# Altium PCB PCB_ESP32.PcbDoc
Units mm, origin at the board's own origin, x right, y up, seen from the top; angles counter-clockwise.
Board outline 57.76 x 27.88 mm, 2 copper layers (Top Layer, Bottom Layer); 40 components, 42 nets, 209 pads, 82 vias.
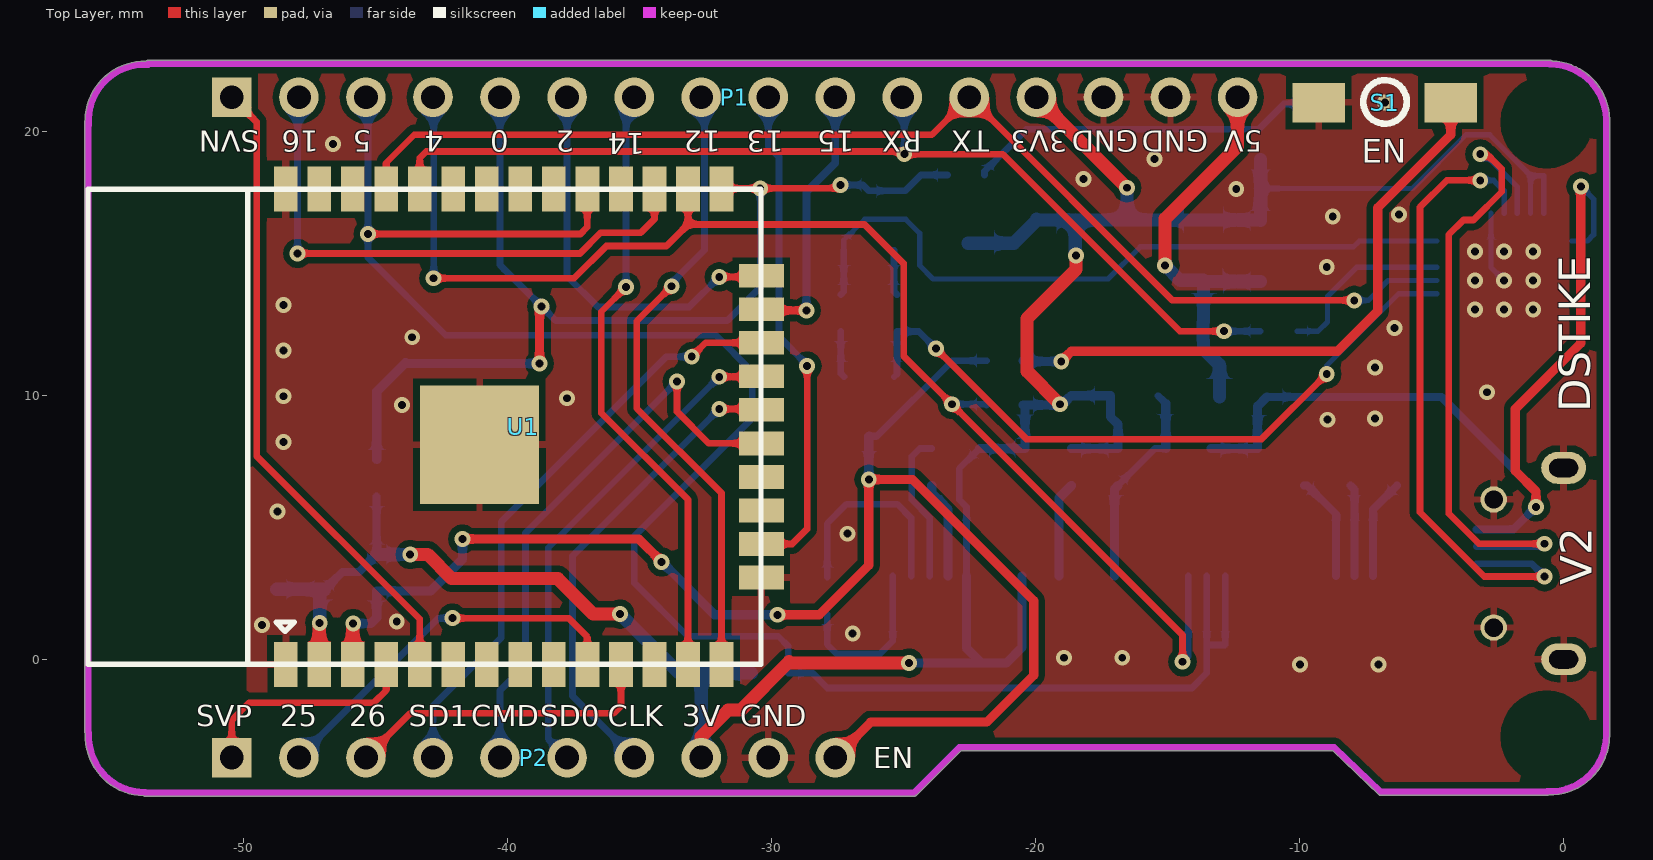
[diagram p0: Top Layer view]
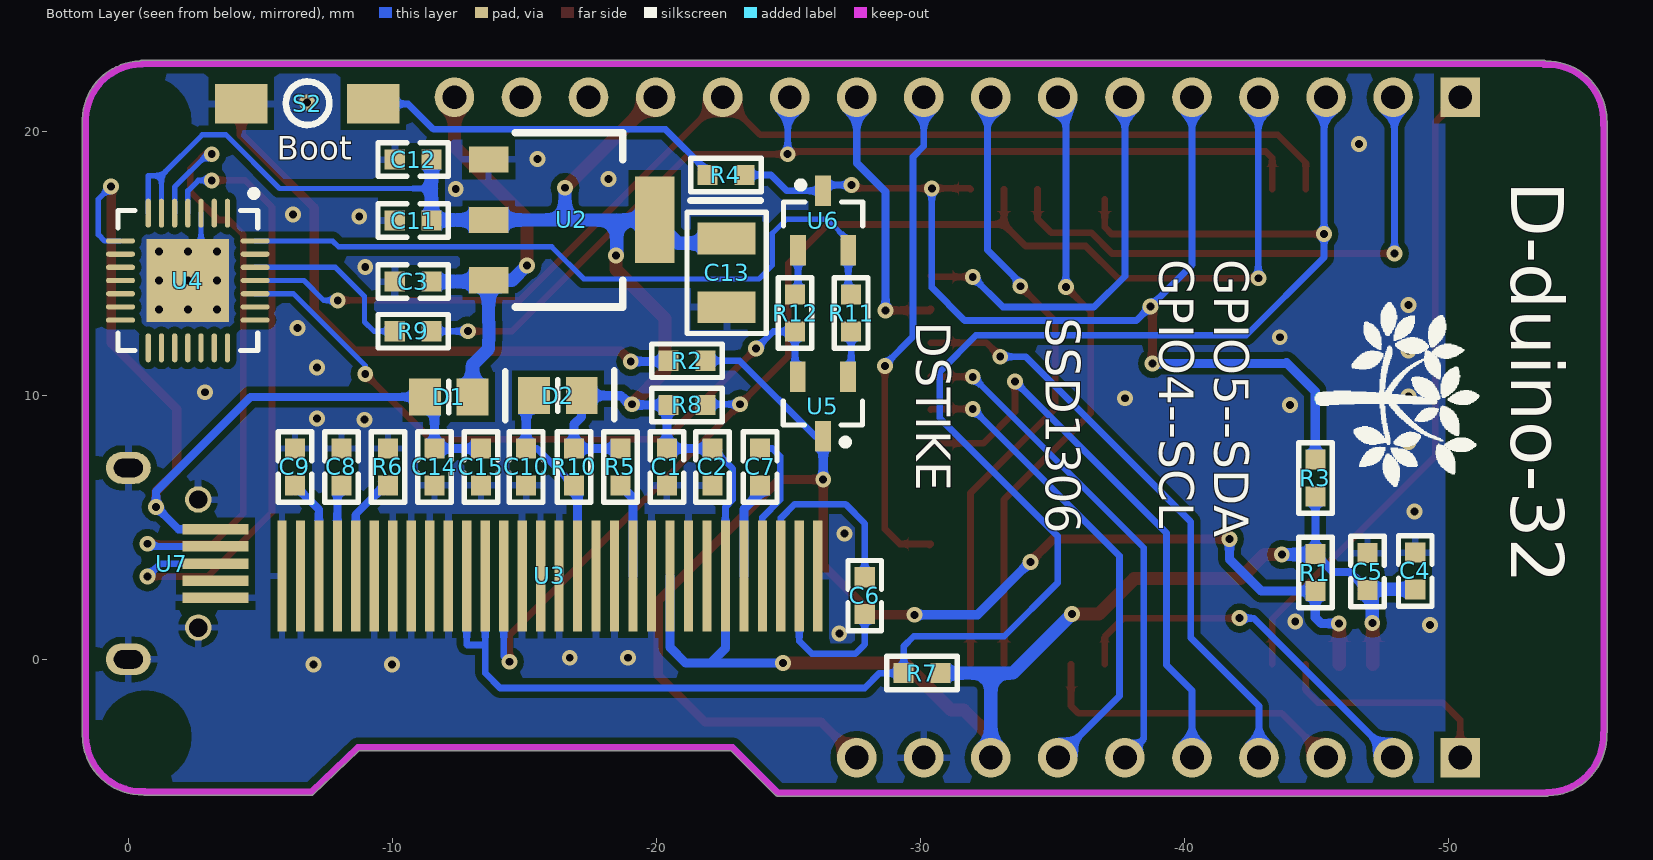
[diagram p1: Bottom Layer view, seen from below]

## Layer stack, top to bottom
Top Solder: solder mask 0.0102, Solder Resist, Dk 3.5
Top Layer: signal copper 0.0356
Dielectric 1: dielectric 0.32, FR-4, Dk 4.8
Bottom Layer: signal copper 0.0356
Bottom Solder: solder mask 0.0102, Solder Resist, Dk 3.5

## Board outline
-53.729,-5.184 -24.607,-5.184 ccw(c-24.607,-5.057) -24.517,-5.146 -24.517,-5.147 -22.841,-3.471 -8.742,-3.471 -7.014,-5.114 ccw(c-6.927,-5.022) -6.927,-5.149 -0.619,-5.149 ccw(c-0.619,-5.022) -0.563,-5.136 ccw(c-0.516,-2.882) 1.737,-2.95 ccw(c1.617,-2.907) 1.745,-2.907 1.745,20.41 ccw(c1.617,20.41) 1.742,20.435 ccw(c1.617,20.461) 1.745,20.461 ccw(c1.617,20.461) 1.745,20.464 ccw(c-0.509,20.412) -0.441,22.666 ccw(c-0.519,22.565) -0.519,22.692 -53.625,22.692 ccw(c-53.625,22.565) -53.71,22.66 ccw(c-53.755,20.406) -56.009,20.447 ccw(c-55.888,20.406) -56.016,20.406 -56.016,-2.784 ccw(c-55.888,-2.784) -56.002,-2.843 ccw(c-53.748,-2.912) -53.794,-5.166 ccw(c-53.729,-5.057)

## Design rules (kind name [scope] priority, off if disabled: settings)
Clearance [All] p1: gap=0.254
PolygonConnect PolygonConnect_cp2102 [HasFootprint('cp2102') And OnLayer('Bottom Layer')] p1: connectstyle=Direct reliefconductorwidth=0.254 reliefentries=4 polygonreliefangle="90 Angle" airgapwidth=0.254
PolygonConnect PolygonConnect_GND [IsVia] p2: connectstyle=Direct reliefconductorwidth=0.254 reliefentries=4 polygonreliefangle="90 Angle" airgapwidth=0.254
PolygonConnect [All] p3: connectstyle=Relief reliefconductorwidth=0.254 reliefentries=4 polygonreliefangle="90 Angle" airgapwidth=0.254
RoutingVias [All] p1: holewidth=0.711 width=1.27 viastyle="Through Hole" minholewidth=0.711 minwidth=1.27 maxholewidth=0.711 maxwidth=1.27
SolderMaskExpansion [All] p1: expansion=0.102
Width [All] p1: maxlimit=1 minlimit=0.2 preferedwidth=0.254
30 further rules are at their usual default settings.

## Components (designator, comment, footprint, x,y, rotation, side; value= is the part's Value field where it differs from the comment)
C1 "1uF" C0603 -20.224,8.011 r270 bottom
C2 "1uF" C0603 -21.954,8.011 r270 bottom
C3 "10uF" C0603 -11.515,14.488 r0 bottom
C4 "10uF" C0603 -48.929,2.626 r90 bottom
C5 "22uF" C0603 -47.125,2.6 r90 bottom
C6 "1uF" C0603 -28.075,1.686 r90 bottom
C7 "1uF" C0603 -24.113,6.563 r90 bottom
C8 "4.7uF" C0603 -8.247,6.563 r90 bottom
C9 "2.2uF" C0603 -6.485,6.563 r90 bottom
C10 "4.7uF" C0603 -14.893,8.011 r270 bottom
C11 "10uF" C0603 -11.515,16.799 r0 bottom
C12 "100nF" C0603 -11.515,19.11 r0 bottom
C13 "100uF" C3528 -22.665,14.64 r270 bottom
C14 "10uF" C0603 -11.415,8.011 r270 bottom
C15 "100nF" C0603 -13.177,8.011 r270 bottom
D1 "1N5819" 1N4148 -11.321,9.919 r180 bottom
D2 "1N4148" 1N4148 -15.452,9.966 r180 bottom
P1 "Header 16" HDR1X16 -50.453,21.295 r0 top
P2 "Header 10" HDR1X10 -50.453,-3.724 r0 top
R1 "12K" R0603 -44.966,3.286 r90 bottom
R2 "470" R0603 -21.167,11.313 r180 bottom
R3 "12K" R0603 -44.966,6.868 r270 bottom
R4 "470" R0603 -22.64,18.348 r180 bottom
R5 "4.7K" R0603 -18.64,7.287 r270 bottom
R6 "910K" R0603 -9.831,7.287 r270 bottom
R7 "4.7K" R0603 -30.069,-0.524 r0 bottom
R8 "4.7K" R0603 -21.167,9.636 r180 bottom
R9 "470" R0603 -10.791,12.43 r180 bottom
R10 "4.7K" R0603 -16.879,7.287 r270 bottom
R11 "12K" R0603 -27.383,13.116 r90 bottom
R12 "12K" R0603 -25.256,13.116 r270 bottom
S1 "贴片按钮" SWITCH -6.714,21.142 r270 top
S2 "贴片按钮" SWITCH -6.841,21.092 r270 bottom
U1 "ESP32s" ESP32S -41.131,8.252 r90 top
U2 "AMS1117" AMS1117 -17.23,16.672 r270 bottom
U3 "SSD1306" SSD1306 -26.296,2.651 r0 bottom
U4 "CP2102" CP2102 -2.228,14.351 r270 bottom
U5 "S8050" S8050 -26.385,9.654 r270 bottom
U6 "S8050" S8050 -26.243,16.545 r90 bottom
U7 "MicroUSB-5P" MICROUSB_5S -2.65,1.205 r90 bottom

## Footprints (in the part's own frame and the unit in brackets; to place one, negate y for a bottom-side part, rotate by r counter-clockwise, add the part's x,y. Pads: shape width x height; smd on the part's side, far side on the other; paste and mask are expansions set on the pad)
1N4148 [mm]
  rect 1.2x1.4 smd: 1(-0.082,0.022) 2(1.718,0.022)
  silkscreen extent 0.82,-0.87 2.96,0.98, body extent -0.26,-0.68 1.89,0.72, height 0.7
AMS1117 [mil]
  rect 39x59 smd: 1(-89,-141) 3(91,-141)
  rect 38.98x59.06 smd: 2(1,-141)
  rect 129.13x59 smd: 2(1,107.03)
  silkscreen extent -129,-101 131,59
C0603 [mil]
  rect 30x30 smd: 1(1,7) 2(56,7)
  silkscreen extent -24,-18 81,32
C3528 [mm]
  rect 1.2x2.2 smd: 1(-1.3,0) 2(1.3,0)
  silkscreen extent -2.74,-1.5 2.3,1.5
CP2102 [mm]
  oval 1.1x0.2 smd: 1(-2.55,1.525) 2(-2.55,1.025) 3(-2.55,0.525) 4(-2.55,0.025) 5(-2.55,-0.475) 6(-2.55,-0.975) 7(-2.55,-1.475) 15(2.55,-1.475) 16(2.55,-0.975) 17(2.55,-0.475) 18(2.55,0.025) 19(2.55,0.525) 20(2.55,1.025) 21(2.55,1.525)
  oval 0.2x1.1 smd: 8(-1.5,-2.525) 9(-1,-2.525) 10(-0.5,-2.525) 11(0,-2.525) 12(0.5,-2.525) 13(1,-2.525) 14(1.5,-2.525) 22(1.5,2.575) 23(1,2.575) 24(0.5,2.575) 25(0,2.575) 26(-0.5,2.575) 27(-1,2.575) 28(-1.5,2.575)
  rect 3.13x3.13 smd: 29(0,0.025)
  silkscreen extent -3.42,-2.62 2.65,2.68, body extent -2.5,-2.47 2.5,2.53, height 1
ESP32S [mm]
  rect 1.7x0.9 smd: 1(-8.441,7.283) 2(-8.441,6.013) 3(-8.441,4.743) 4(-8.441,3.473) 5(-8.441,2.203) 6(-8.441,0.933) 7(-8.441,-0.337) 8(-8.441,-1.607) 9(-8.441,-2.877) 10(-8.441,-4.147) 11(-8.441,-5.417) 12(-8.441,-6.687) 13(-8.441,-7.957) 14(-8.441,-9.227) 25(9.559,-9.227) 26(9.559,-7.957) 27(9.559,-6.687) 28(9.559,-5.417) 29(9.559,-4.147) 30(9.559,-2.877) 31(9.559,-1.607) 32(9.559,-0.337) 33(9.559,0.933) 34(9.559,2.203) 35(9.559,3.473) 36(9.559,4.743) 37(9.559,6.013) 38(9.559,7.283)
  rect 0.9x1.7 smd: 15(-5.151,-10.737) 16(-3.881,-10.737) 17(-2.611,-10.737) 18(-1.341,-10.737) 19(-0.071,-10.737) 20(1.199,-10.737) 21(2.469,-10.737) 22(3.739,-10.737) 23(5.009,-10.737) 24(6.279,-10.737)
  rect 4.5x4.5 smd: 39(-0.121,-0.057)
  silkscreen extent -8.44,-10.73 9.56,14.77
HDR1X10 [mm] "Connector; Header; 10 Position"
  rect 1.5x1.5 hole 0.9: 1(0,0)
  round 1.5 hole 0.9: 2(2.54,0) 3(5.08,0) 4(7.62,0) 5(10.16,0) 6(12.7,0) 7(15.24,0) 8(17.78,0) 9(20.32,0) 10(22.86,0)
HDR1X16 [mm] "Connector; Header; 16 Position"
  rect 1.5x1.5 hole 0.9: 1(0,0)
  round 1.5 hole 0.9: 2(2.54,0) 3(5.08,0) 4(7.62,0) 5(10.16,0) 6(12.7,0) 7(15.24,0) 8(17.78,0) 9(20.32,0) 10(22.86,0) 11(25.4,0) 12(27.94,0) 13(30.48,0) 14(33.02,0) 15(35.56,0) 16(38.1,0)
MICROUSB_5S [mm]
  rect 0.4x2.5 smd: 1(3.721,-0.65) 2(3.071,-0.65) 3(2.421,-0.65) 4(1.771,-0.65) 5(1.121,-0.65)
  round 1 hole 0.7 unplated: 6(0,0) 7(4.85,0)
  oval 1.2x1.7 hole 0.7 slot 1.1 at 90 deg unplated: 8(-1.205,2.65) 9(6.045,2.65)
R0603 [mil]
  rect 30x30 smd: 1(-27.5,0) 2(27.5,0)
  silkscreen extent -52,-25 52,25
S8050 [mm]
  rect 1.15x0.6 smd: 1(-1.049,0.874) 2(-1.049,-1.026) 3(1.201,-0.076)
  silkscreen extent -0.12,-1.58 1.55,1.42, body extent -0.62,-1.58 0.78,1.42, height 1.1
SSD1306 [mm]
  rect 0.35x4.2 smd: 1(0.178,-0.508) 2(0.878,-0.508) 3(1.578,-0.508) 4(2.278,-0.508) 5(2.978,-0.508) 6(3.678,-0.508) 7(4.378,-0.508) 8(5.078,-0.508) 9(5.778,-0.508) 10(6.478,-0.508) 11(7.178,-0.508) 12(7.878,-0.508) 13(8.578,-0.508) 14(9.278,-0.508) 15(9.978,-0.508) 16(10.678,-0.508) 17(11.378,-0.508) 18(12.078,-0.508) 19(12.778,-0.508) 20(13.478,-0.508) 21(14.178,-0.508) 22(14.878,-0.508) 23(15.578,-0.508) 24(16.278,-0.508) 25(16.978,-0.508) 26(17.678,-0.508) 27(18.378,-0.508) 28(19.078,-0.508) 29(19.778,-0.508) 30(20.478,-0.508)
SWITCH [mm]
  rect 1.5x2 smd: 1(0.051,2.438) 2(0.051,-2.562)
  silkscreen extent -0.8,-0.87 0.85,0.77

## Part data
C1 C2 C3 C4 C5 C6 C7 C8 C9 C10 C11 C12 C14 C15: library part C0603, "贴片电容"
C13: library part "Cap Semi", "Capacitor 3.5x2.8mm"
D1: library part 1N4148, "二极管"
D2: "二极管"
P1: "Header, 16-Pin"
P2: "Header, 10-Pin"
R1 R2 R3 R4 R5 R6 R7 R8 R9 R10 R11 R12: library part R0603, "贴片电阻"
S1 S2: library part Switch, "3*4*2mm开关"
U1: library part ESP32, "WIFI&Bluetooth"
U2: "3.3V稳压芯片"
U3: "0.96寸OLED"
U4: "USB转串口芯片"
U5 U6: "三极管"
U7: library part MicroUSB_5S, "Micro USB插脚"

## Free pads (board coordinates)
  round 3 on Keep-Out: ""(-53.755,-2.911) ""(-53.755,20.38) ""(-0.646,-2.937) ""(-0.646,20.355)

## Via types
v1: diameter 0.6, hole 0.3, Top Layer to Bottom Layer, tented both sides, 82 vias

## Nets (pads, with @x,y where several pads share a name; then routed paths per layer and width w, separated by ;. In a path a pad name is that pad's centre, name@x,y a point inside that pad or via, vN(x,y) a via of type N, cw(c..) or ccw(c..) an arc to the next point about the centre after c; other vN are vias at no path point)
#EN: P2.10 R1.1 R2.2 U1.3 U5.3 | length 55.7
  Top Layer w0.35: v1(-41.715,4.556) -35.035,4.556 v1(-34.171,3.693) ; v1(-29.777,1.686) -28.202,1.686 -26.323,3.566 v1(-26.323,6.817) -24.672,6.817 -20.074,2.219 -20.074,-0.6 -21.852,-2.378 -26.247,-2.378 P2.10
  Top Layer w0.5: U1.3 -45.874,1.337 v1(-45.855,1.356)
  Bottom Layer w0.254: U5.3 -26.007,8.453 -23.148,11.313 R2.2
  Bottom Layer w0.35: v1(-45.855,1.356) -45.195,1.356 -44.966,1.584 R1.1 -42.922,2.588 -41.715,3.794 v1(-41.715,4.556) ; v1(-34.171,3.693) -32.165,1.686 v1(-29.777,1.686) ; v1(-26.323,6.817) -26.323,8.439 U5.3
CLK: P2.7 U1.20 | length 18.1
  Top Layer w0.254: v1(-31.987,9.484) -30.427,9.484 U1.20
  Bottom Layer w0.254: P2.7 -37.55,-1.387 -37.55,3.921 v1(-31.987,9.484)
CMD: P2.5 U1.19 | length 21.9
  Top Layer w0.254: v1(-33.587,10.525) -33.587,9.382 -32.386,8.181 U1.19
  Bottom Layer w0.254: P2.5 -40.293,-1.184 -39.328,-0.219 -39.328,4.785 v1(-33.587,10.525)
D_N: U4.5 U7.2 | length 24.8
  Top Layer w0.254: v1(-3.158,19.136) -2.904,19.136 -2.345,18.577 -2.345,17.713 -3.412,16.647 -3.793,16.647 -4.352,16.088 -4.352,5.521 -3.209,4.378 v1(-0.72,4.378)
  Bottom Layer w0.2: v1(-3.158,19.136) -2.999,19.136 -1.753,17.89 U4.5
  Bottom Layer w0.254: U7.2 -0.822,4.276 v1(-0.72,4.378)
D_P: U4.4 U7.3 | length 24.7
  Top Layer w0.254: v1(-3.158,18.145) -4.428,18.145 -5.444,17.129 -5.444,5.572 -3.006,3.134 v1(-0.72,3.134)
  Bottom Layer w0.2: v1(-3.158,18.145) -2.65,18.145 -2.253,17.748 U4.4
  Bottom Layer w0.254: U7.3 -1.211,3.626 v1(-0.72,3.134)
DTR: R11.2 U4.28 U6.2 | length 27.2
  Bottom Layer w0.2: U6.2 -27.269,15.878 -26.475,16.672 -24.926,16.672 -24.392,16.139 -24.392,14.919 -23.884,14.411 -17.255,14.411 -16.036,15.631 -7.959,15.631 -7.739,15.851 U4.28
  Bottom Layer w0.254: R11.2 -27.269,13.928 U6.2
GND: C1.2 C2.2 C3.2 C4.2 C5.2 C8.2 C9.2 C10.2 C11.2 C12.2 C13.2 C14.2 C15.2 P1.14 P1.15 P2.9 R6.1 S1.2 S2.2 U1.1 U1.15 U1.38 U1.39 U2.1 U3.1 U3.8 U3.10 U3.12 U3.13 U3.15 U3.16 U3.17 U3.21 U3.22 U3.23 U3.24 U3.25 U3.29 U3.30 U4.3 U4.29 U7.5 U7.6 U7.7 U7.8 U7.9 | length 2.8
  Bottom Layer w0.2: U4.3 -2.753,14.851 v1(-2.253,14.351)
  other v1: -9.991,-0.194 -7.019,-0.194 -18.931,0.06 -16.722,0.06 -26.932,0.975 -49.31,1.305 -44.204,1.432 -27.136,4.759 -48.726,5.598 -48.497,8.239 -8.949,9.077 -7.146,9.128 -44.001,9.636 -37.753,9.89 -48.497,9.966 -2.904,10.119 -7.146,11.059 -48.497,11.694 -43.62,12.202 -6.409,12.557 -3.353,13.251 -2.253,13.251 -1.153,13.251 -48.497,13.421 -3.353,14.351 -1.153,14.351 -8.975,14.869 -3.353,15.451 -2.253,15.451 -1.153,15.451 -8.746,16.774 -6.231,16.85 -12.404,17.815 -18.195,18.196 -15.502,18.958 -46.617,19.517 -6.765,21.092
GPIO0: P1.5 R3.1 R4.2 U1.25 U6.3 | length 41.8
  Top Layer w0.254: U1.25 -31.874,17.84 v1(-30.438,17.84) -27.517,17.84 v1(-27.39,17.967)
  Top Layer w0.35: v1(-38.794,11.211) -38.794,13.294 v1(-38.718,13.37)
  Bottom Layer w0.254: P1.5 -40.293,14.945 -40.14,14.792 ; -40.14,14.767 -40.14,14.792 ; v1(-30.438,17.84) -30.438,14.081 -31.682,12.837 -38.185,12.837 v1(-38.718,13.37) -40.14,14.792 ; v1(-27.39,17.967) -26.541,17.967 U6.3 -24.944,17.746 -24.342,18.348 R4.2
  Bottom Layer w0.35: R3.1 -44.966,10.144 -43.874,11.236 -43.849,11.211 v1(-38.794,11.211)
GPIO2: P1.6 U1.24 | length 15.1
  Top Layer w0.254: v1(-31.987,14.488) -30.437,14.488 U1.24
  Bottom Layer w0.254: P1.6 -37.753,14.513 -36.584,13.345 -33.13,13.345 v1(-31.987,14.488)
GPIO4: P1.4 R8.2 U1.26 U3.18 | length 51.6
  Top Layer w0.254: v1(-42.807,14.437) -37.484,14.437 -36.265,15.656 -33.994,15.656 -33.174,16.476 ; U1.26 -33.174,16.476 ; v1(-14.436,-0.092) -14.436,0.924 v1(-23.173,9.662) -25.002,11.49 -25.002,14.996 -26.482,16.476 -33.174,16.476
  Bottom Layer w0.254: P1.4 -42.807,21.269 v1(-42.807,14.437) ; v1(-23.173,9.662) -21.89,9.662 R8.2 ; v1(-14.436,-0.092) -14.218,0.125 U3.18
GPIO5: P1.3 R7.2 U1.29 U3.19 U3.20 | length 72.9
  Top Layer w0.254: v1(-45.297,16.113) -37.245,16.113 -36.991,16.367 U1.29@-36.991,17.434
  Bottom Layer w0.254: P1.3 -45.297,21.219 v1(-45.297,16.113) -45.297,15.224 -42.35,12.278 -32.114,12.278 -30.742,10.906 -30.742,9.128 -35.213,4.658 -35.213,2.905 -33.181,0.873 -29.752,0.873 -29.371,0.492 R7.2 -28.456,-0.524 -27.898,-1.083 -14.08,-1.083 -13.518,-0.521 -13.518,0.571 ; U3.19 -13.518,0.571 ; U3.20 -12.818,0.56 -12.835,0.543 -13.49,0.543 -13.518,0.571
GPIO12: P1.8 U1.14 | length 23.9
  Top Layer w0.254: v1(-33.79,14.132) -35.111,12.811 -35.111,9.509 -31.904,6.302 U1.14
  Bottom Layer w0.254: v1(-33.79,14.132) -33.79,14.259 -32.546,15.504 -32.546,21.168 P1.8
GPIO13: P1.9 U1.16 | length 19
  Top Layer w0.254: U1.16@-30.351,4.328 U1.16 -29.226,4.371 -28.66,4.937 v1(-28.66,11.109)
  Bottom Layer w0.254: P1.9 -30.133,19.441 -29.726,19.034 -29.726,12.227 -28.736,11.236 -28.761,11.211 v1(-28.66,11.109)
GPIO14: P1.7 U1.13 | length 23.4
  Top Layer w0.254: v1(-35.518,14.107) -36.457,13.167 -36.457,9.331 -33.174,6.048 U1.13
  Bottom Layer w0.254: v1(-35.518,14.107) -35.518,20.787 -35.187,21.117 -35.187,21.269 P1.7
GPIO15: P1.10 U1.23 | length 10.3
  Top Layer w0.3: U1.23 -30.351,13.218 v1(-28.685,13.218)
  Bottom Layer w0.3: v1(-28.685,13.218) -28.685,17.713 -27.593,18.806 P1.10
GPIO16: P1.2 U1.27 | length 21.2
  Top Layer w0.254: v1(-47.964,15.377) -37.263,15.377 -36.476,16.164 -34.959,16.164 -34.444,16.679 U1.27
  Bottom Layer w0.254: v1(-47.964,15.377) -47.964,21.193 -47.887,21.269 P1.2
GPIO25: P2.2 U1.10 | length 14.4
  Top Layer w0.254: v1(-42.096,1.559) -37.702,1.559 -36.984,0.841 U1.10
  Bottom Layer w0.254: P2.2 -42.63,1.559 v1(-42.096,1.559)
GPIO26: P2.3 U1.11 | length 12
  Top Layer w0.254: P2.3 -43.696,-2.048 -36,-2.048 -35.714,-1.761 U1.11
NetC6_1: C6.1 U3.2 | length 6.4
  Bottom Layer w0.254: C6.1 -27.898,0.568 -27.542,0.213 -25.891,0.213 -25.418,0.686 U3.2
NetC6_2: C6.2 U3.3 | length 7.9
  Bottom Layer w0.254: C6.2 -27.898,5.14 -27.161,5.877 -25.243,5.877 -24.718,5.352 U3.3
NetC7_1: C7.1 U3.5 | length 3.7
  Bottom Layer w0.35: C7.1 -23.935,6.304 -23.318,5.687 U3.5
NetC7_2: C7.2 U3.4 | length 5.7
  Bottom Layer w0.254: U3.4 -24.018,5.37 -24.697,6.049 -24.697,7.68 -24.392,7.985 C7.2
NetC8_1: C8.1 U3.27 | length 3.5
  Bottom Layer w0.3: C8.1 -7.918,6.437 U3.27
NetC9_1: C9.1 U3.28 | length 3.8
  Bottom Layer w0.3: U3.28 -7.218,5.678 C9.1
NetC10_1: C10.1 D2.1 R10.2 U3.14 | length 8
  Bottom Layer w0.254: R10.2 -15.482,7.985 C10.1 ; D2.1 D2.1@-15.071,9.689
  Bottom Layer w0.35: U3.14 -17.018,6.449 R10.2 ; C10.1 D2.1@-15.071,9.689
NetR2_1: R2.1 S1.1 | length 23.3
  Top Layer w0.35: v1(-19.033,11.287) -18.652,11.668 -8.568,11.668 -7.044,13.192 -7.044,17.104 -4.276,19.872 S1.1
  Bottom Layer w0.35: R2.1 -20.443,11.287 v1(-19.033,11.287)
NetR4_1: R4.1 S2.1 | length 13.9
  Bottom Layer w0.254: R4.1 -21.941,18.488 -20.354,20.076 -11.565,20.076 -10.6,21.041 S2.1
NetR5_2: R5.2 U3.11 | length 3.6
  Bottom Layer w0.35: U3.11 -19.118,6.11 R5.2
NetR6_2: R6.2 U3.26 | length 4
  Bottom Layer w0.3: R6.2 -9.711,6.588 -8.618,5.495 U3.26
NetR9_1: R9.1 U4.26 | length 6.9
  Bottom Layer w0.2: R9.1 -9.305,12.43 -8.949,12.786 -8.949,13.751 -7.85,14.851 U4.26
NetR11_1: R11.1 U5.1 | length 1.8
  Bottom Layer w0.254: R11.1 -27.383,10.827 U5.1
NetR12_1: R12.1 U6.1 | length 1.7
  Bottom Layer w0.254: U6.1 -25.369,13.928 R12.1
RTS: R12.2 U4.24 U5.2 | length 26.4
  Top Layer w0.254: v1(-23.783,11.77) -20.354,8.341 -11.438,8.341 v1(-8.975,10.805)
  Bottom Layer w0.2: v1(-8.975,10.805) -8.975,11.135 -6.259,13.851 U4.24
  Bottom Layer w0.254: U5.2 -25.256,10.806 R12.2 -24.43,12.418 v1(-23.783,11.77)
RXD0: P1.11 R9.2 U1.34 | length 38.1
  Top Layer w0.254: U1.34 -43.334,18.99 -43.087,19.237 v1@-24.977,19.237 ; v1(-24.977,19.136) -21.243,19.136 -14.537,12.43 v1(-12.861,12.43)
  Bottom Layer w0.254: P1.11 -24.977,21.219 v1(-24.977,19.136) ; v1(-12.861,12.43) R9.2
SD0: P2.6 U1.21 | length 19
  Top Layer w0.254: v1(-31.987,10.703) -30.412,10.703 U1.21
  Bottom Layer w0.254: P2.6 -38.464,-3.013 -38.464,4.226 v1(-31.987,10.703)
SD1: P2.4 U1.22 | length 22.7
  Top Layer w0.254: v1(-33.028,11.465) -32.503,11.991 U1.22
  Bottom Layer w0.254: P2.4 -42.833,-1.768 -40.242,0.822 -40.242,5.217 -33.994,11.465 v1(-33.028,11.465)
SENSOR_VN: P1.1 U1.5 | length 24.4
  Top Layer w0.254: P1.1 -49.513,20.355 -49.513,7.706 -43.334,1.527 U1.5
SENSOR_VP: P2.1 U1.4 | length 8.7
  Top Layer w0.254: P2.1 -50.453,-2.302 -49.792,-1.641 -45.068,-1.641 -44.604,-1.177 U1.4
TXD0: P1.12 U1.35 U4.25 | length 45.3
  Top Layer w0.254: U1.35 -44.604,18.813 -43.544,19.872 -23.935,19.872 P1.12 -14.817,13.599 v1(-7.933,13.599)
  Bottom Layer w0.2: v1(-7.933,13.599) -7.4,13.599 -6.648,14.351 U4.25
VCC_3V3: C1.1 C2.1 C4.1 C5.1 C11.1 C12.1 C13.1 D2.2 P1.13 P2.8 R1.2 R3.2 R5.1 R7.1 R8.1 R10.1 U1.2 U2.2 U3.6 U3.9 U4.6 U4.7 | length 108.5
  Top Layer w0.5: U1.2 -47.144,1.363 v1(-47.125,1.381) ; v1(-43.696,3.972) -43.036,3.972 -42.122,3.058 -38.108,3.058 -36.762,1.711 v1(-35.746,1.711) ; P2.8 -32.673,-2.937 -31.657,-1.921 -31.174,-1.921 -29.345,-0.092 -29.295,-0.143 v1(-24.799,-0.143) ; P1.13 v1(-16.544,17.866) ; v1(-19.084,9.662) -20.328,10.906 -20.328,12.913 -18.474,14.767 v1(-18.474,15.3)
  Bottom Layer w0.2: -11.515,17.84 -11.489,17.84 -5.723,17.84 -3.691,19.872 -2.802,19.872 -1.253,18.323 ; U4.6 -1.253,18.323 ; U4.7 -0.753,18.323 -1.253,18.323
  Bottom Layer w0.254: U3.6 -22.618,5.774 -22.894,6.049 -22.894,7.223 C2.1
  Bottom Layer w0.3: C5.1 -46.262,3.312 -45.639,3.312 R1.2 R3.2
  Bottom Layer w0.35: v1(-24.799,-0.143) -22.157,-0.143 ; U3.6 -22.618,0.42 -22.106,-0.092 -22.157,-0.143 ; C2.1 C1.1 -20.402,9.57 R8.1 -19.008,9.636 -18.655,9.988 D2.2 -17.17,9.195 -16.879,8.904 R10.1 R5.1 ; U3.9 -20.518,0.455 -21.116,-0.143 -22.157,-0.143
  Bottom Layer w0.5: C4.1 -46.973,2.651 C5.1 -47.125,2.448 v1(-47.125,1.381) ; R1.2 -44.954,3.972 v1(-43.696,3.972) ; v1(-35.746,1.711) -33.511,-0.524 -32.673,-0.524 ; P2.8 -32.673,-0.524 ; R7.1 -32.673,-0.524 ; C13.1@-22.564,15.762 -20.833,15.762 U2.2@-19.948,16.647 ; U2.2@-19.973,16.671 U2.2@-19.948,16.647 ; v1(-18.474,15.3) -18.5,15.326 -18.5,16.647 ; v1(-16.544,17.866) -16.544,16.647 ; C11.1@-11.515,16.647 -13.648,16.647 -16.544,16.647 ; C11.1 -11.489,17.84 C12.1 ; U2.2@-19.948,16.647 -18.5,16.647 ; -18.5,16.647 -16.544,16.647
VCC_5V: C3.1 D1.2 P1.16 U2.3 | length 16.1
  Top Layer w0.5: v1(-15.096,14.919) -15.096,16.697 -12.353,19.441 P1.16
  Bottom Layer w0.5: v1(-15.096,14.919) -14.537,14.361 U2.3 ; D1.2 -13.039,11.16 -13.648,11.77 -13.648,12.081 -13.665,12.097 -13.665,12.763 -13.648,12.78 U2.3 ; C3.1 -13.597,14.31 U2.3
VCC_USB: C14.1 C15.1 D1.1 U4.8 U7.1 | length 35.2
  Top Layer w0.35: v1(-1.05,5.775) -1.05,6.36 -1.837,7.147 -1.837,9.484 0.652,11.973 v1(0.652,17.917)
  Bottom Layer w0.2: U4.8 0.897,15.851 1.136,16.089 1.136,17.432 v1(0.652,17.917)
  Bottom Layer w0.3: D1.1 -4.631,9.941 -1.05,6.36 v1(-1.05,5.775) -1.9,4.926 U7.1
  Bottom Layer w0.35: C15.1 C14.1 -11.593,9.586 D1.1
pads on no net: U1.6 U1.7 U1.8 U1.9 U1.12 U1.17 U1.18 U1.28 U1.30 U1.31 U1.32 U1.33 U1.36 U1.37 U3.7 U4.1 U4.2 U4.9 U4.10 U4.11 U4.12 U4.13 U4.14 U4.15 U4.16 U4.17 U4.18 U4.19 U4.20 U4.21 U4.22 U4.23 U4.27 U7.4

## Polygon pours and split planes (outlines as drawn)
GND on Bottom Layer "Top Layer-No Net" (solid, remove dead copper, pour order 36): -56.879,23.073 -56.727,23.225 3.192,23.225 3.192,-7.102 3.116,-7.179 2.963,-7.331 -57.133,-7.331
GND on Top Layer "Top Layer-No Net" (solid, remove dead copper, pour order 38): -56.854,23.327 3.141,23.327 3.344,23.124 3.268,23.047 3.268,-7.255 -57.158,-7.255 -57.209,-7.204

## Keep-outs
Keep-Out Layer:
  lines w0.254: -55.888,-2.784 -55.888,20.406 ; -55.875,20.236 cw(c-53.755,20.406) -53.625,22.529 ; -55.871,-2.785 ccw(c-53.748,-2.912) -53.73,-5.039 ; -53.729,-5.057 -24.607,-5.057 -22.894,-3.343 -8.692,-3.343 -6.927,-5.022 -0.619,-5.022 ; -53.625,22.565 -0.519,22.565 ; -0.619,-5.007 ccw(c-0.516,-2.882) 1.611,-2.907 ; -0.519,22.539 cw(c-0.509,20.412) 1.617,20.461 ; 1.617,-2.907 1.617,20.41

## Other copper
Top Layer:
  pour cut-out: -49.894,22.692 -49.894,-5.057 -55.671,-5.057 -55.99,-5.375 -56.117,-5.248 -56.117,22.692
Bottom Layer:
  pour cut-out: -49.894,22.692 -49.894,-5.057 -55.671,-5.057 -55.99,-5.375 -56.117,-5.248 -56.117,22.692

## Silkscreen, mask and mechanical layers (free items; w line width, h text height)
Top Overlay:
  text "SVN" at -49.411,20.025 h0.8 r180
  text "16" at -47.151,20.025 h0.8 r180
  text "5" at -45.17,20.025 h0.8 r180
  text "4" at -42.452,20.025 h0.8 r180
  text "0" at -39.963,20.025 h0.8 r180
  text "2" at -37.473,20.025 h0.8 r180
  text "12" at -31.936,20.025 h0.8 r180
  text "13" at -29.549,20.025 h0.8 r180
  text "15" at -26.882,20.025 h0.8 r180
  text "RX" at -24.316,20.025 h0.8 r180
  text "TX" at -21.751,20.025 h0.8 r180
  text "3V3" at -18.779,20.025 h0.8 r180
  text "GND" at -16.112,20.025 h0.8 r180
  text "GND" at -13.47,20.025 h0.8 r180
  text "5V" at -11.413,20.025 h0.8 r180
  text "14" at -34.806,19.923 h0.8 r180
  text "EN" at -7.654,18.806 h0.9
  text "DSTIKE" at 1.008,9.357 h1.2 r90
  text "V2" at 1.058,2.804 h1.2 r90
  text "SVP" at -51.799,-2.532 h0.8
  text "25" at -48.624,-2.532 h0.8
  text "26" at -46.008,-2.532 h0.8
  text "SD1" at -43.747,-2.532 h0.8
  text "CMD" at -41.385,-2.53 h0.8
  text "SD0" at -38.769,-2.53 h0.8
  text "CLK" at -36.203,-2.53 h0.8
  text "3V" at -33.384,-2.532 h0.8
  text "GND" at -31.2,-2.532 h0.8
  text "EN" at -26.145,-4.131 h0.8
Bottom Overlay:
  drawing of 1036 lines, arcs and shapes, not listed
  text "Boot" at -5.622,18.933 h0.9
  text "D-duino-32" at -52.383,18.12 h2 r90
  text "GPIO5--SDA" at -41.131,15.148 h1.3 r90
  text "GPIO4--SCL" at -39.048,15.148 h1.3 r90
  text "SSD1306" at -34.756,12.938 h1.3 r90
  text "DSTIKE" at -29.853,12.786 h1.3 r90